# EAGLE board OpenAir (EAGLE 6.5.0)
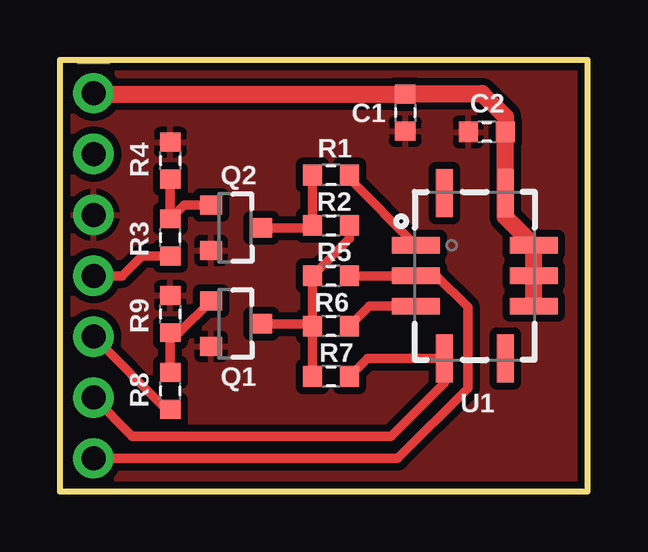
[diagram p0: board, top side]
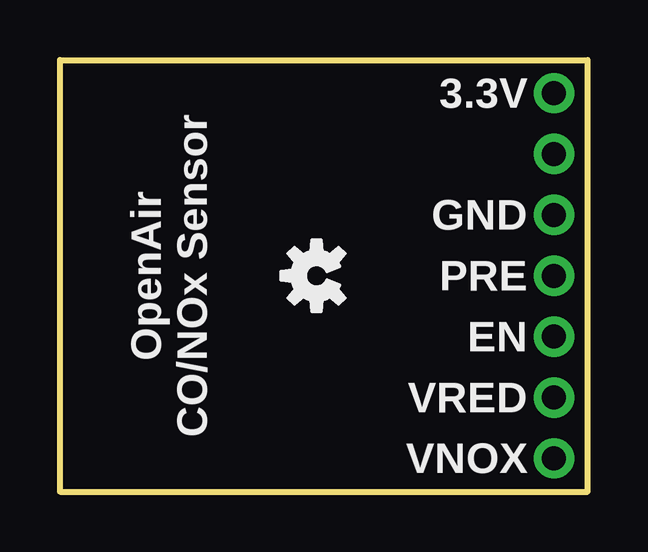
[diagram p1: board, bottom side, seen from below]

Size 22 x 18 mm. Coordinates in mm from the lower left corner, seen from the top.
Outline: 22,18 0,18 0,0 22,0 22,18
Copper layers (1*16): Top 0.035mm / dielectric 1.5mm / Bottom 0.035mm
Design rules "SparkFun-2-layer": minimum track width 7mil, minimum drill 15mil, track to track 8mil, track to pad 8mil, pad to pad 8mil, via to via 8mil, smd to smd 8mil, copper to edge 8mil, drill to drill 8mil, minimum pad ring 12mil, minimum via ring 10mil, stop-mask expansion 4mil, vias tented up to drill 20mil, thermal gap 10mil

## Footprints (pad centres in the part's own frame; a part is rotated, then mirrored left to right if it is on the bottom)
0603 = smd 0.787 x 0.864: 1 -0.775,0; 2 0.775,0
1X07_ROUND = drill 1 pad 1.676: 1 -7.62,0; 2 -5.08,0; 3 -2.54,0; 4 0,0; 5 2.54,0; 6 5.08,0; 7 7.62,0
SOT23-3 = smd 0.8 x 0.9: 1 -0.95,-1; 2 0.95,-1; 3 0,1.1
MICS_10-SMD = smd 0.7 x 2: A 1.27,2.45; B 0,2.45; C -1.27,2.45; F -1.27,-2.45; G 0,-2.45; H 1.27,-2.45 | smd 2 x 0.7: D -3.45,1.27; E -3.45,-1.27; J 3.45,-1.27; K 3.45,1.27

## Placement (x,y rotation side)
C1  10uF  [0603]  14.4,15.8 270 top
C2  0.1u  [0603]  17.8,15 180 top
FRAME1  FRAME-LETTER  [CREATIVE_COMMONS]  -24.24,25.11 0 top  (outside the outline)
JP1  HEADER-1X7ROUND  [1X07_ROUND]  1.4,9 270 top
LOGO1  OSHW-LOGOS  [OSHW-LOGO-S]  11.3,9 90 bottom
Q1  SSM3K329R  [SOT23-3]  7.3,7 270 top
Q2  SSM3K329R  [SOT23-3]  7.3,11 270 top
R1  40  [0603]  11.3,13.2 0 top
R2  22  [0603]  11.3,11.1 180 top
R3  100  [0603]  4.6,10.6 90 top
R4  100K  [0603]  4.6,13.8 270 top
R5  3.9K  [0603]  11.3,9 0 top
R6  29  [0603]  11.3,6.9 0 top
R7  360K  [0603]  11.3,4.8 0 top
R8  100  [0603]  4.6,4.2 90 top
R9  100K  [0603]  4.6,7.4 270 top
U1  MICS-4514  [MICS_10-SMD]  17.3,9 90 top

## Library data of the parts
C1 = everykey; PROD_ID: CAP-11330
C2 JP1 R3-R5 R7-R9 = everykey
FRAME1 LOGO1 = SparkFun-Aesthetics
Q1 Q2 = SparkFun-DiscreteSemi; PROD_ID: TRANS-00830; P_NAME: BSS138
R1 R6 = everykey; DK_ID: 541-82.0CCT-ND
R2 = everykey; PROD_ID: RES-12314
U1 = SparkFun-Sensors; PROD_ID: COMP-12310

## Nets
3.3V: C1.1 C2.1 JP1.1 U1.F U1.G U1.H U1.J
EN: JP1.5 R8.1
EN_GATE: Q1.1 R8.2 R9.2
GND: C1.2 C2.2 JP1.3 Q1.2 Q2.2 R4.1 R9.1
GND_EN: Q1.3 R2.1 R5.1 R6.1 R7.1
N$1: R1.2 U1.A
N$2: R6.2 U1.C
PRE: JP1.4 R3.1
PREHEAT_GATE: Q2.1 R3.2 R4.2
PREHEAT_POWER: Q2.3 R1.1 R2.2
VNOX: JP1.7 R5.2 U1.B
VRED: JP1.6 R7.2 U1.D

## Tracks (layer width: path | path; a pad name or v marks a point on that pad's centre or on a via)
3.3V
  Top 0.7: U1.F U1.G U1.H 18.57,11.45 U1.J C2.1 18.57,15.62 17.6,16.6 14.43,16.6 C1.1 1.45,16.57 JP1.1
EN
  Top 0.4: JP1.5 4.43,3.42 R8.1
EN_GATE
  Top 0.4: R8.2 R9.2 4.97,6.62 Q1.1
GND
  pour Top (isolate 0.305): 0,18 22,18 22,0 0,0
GND_EN
  Top 0.4: R2.1 12.07,10.55 R5.1 R6.1 | R7.1 R6.1 | Q1.3 10.43,7 R6.1
N$1
  Top 0.4: U1.A 12.07,13.04 R1.2
N$2
  Top 0.4: U1.C 12.9,7.73 R6.2
PRE
  Top 0.4: R3.1 3.42,9.82 2.6,9 JP1.4
PREHEAT_GATE
  Top 0.4: R4.2 R3.2 5.17,11.95 Q2.1
PREHEAT_POWER
  Top 0.4: R1.1 R2.2 10.43,11 Q2.3
VNOX
  Top 0.4: R5.2 U1.B 15.7,9 17,7.7 17,4.3 14.08,1.38 JP1.7
VRED
  Top 0.4: JP1.6 3.02,2.3 13.8,2.3 16.03,4.53 U1.D 12.82,5.55 R7.2

## Text on the board
bPlace: 3.3V | GND | PRE | OpenAir / CO/NOx Sensor | EN | VRED | VNOX
tDocu: Matthias Krauss, based on a design by Shawn Hymel